# Altium PCB LV control.PcbDoc
Units mil, origin at the board's own origin, x right, y up, seen from the top; angles counter-clockwise.
Board outline 3341.46 x 4522.56 mil, 2 copper layers (Top Layer, Bottom Layer); 71 components, 60 nets, 271 pads, 23 vias.
Unrouted connection lines stored in the file: 1.
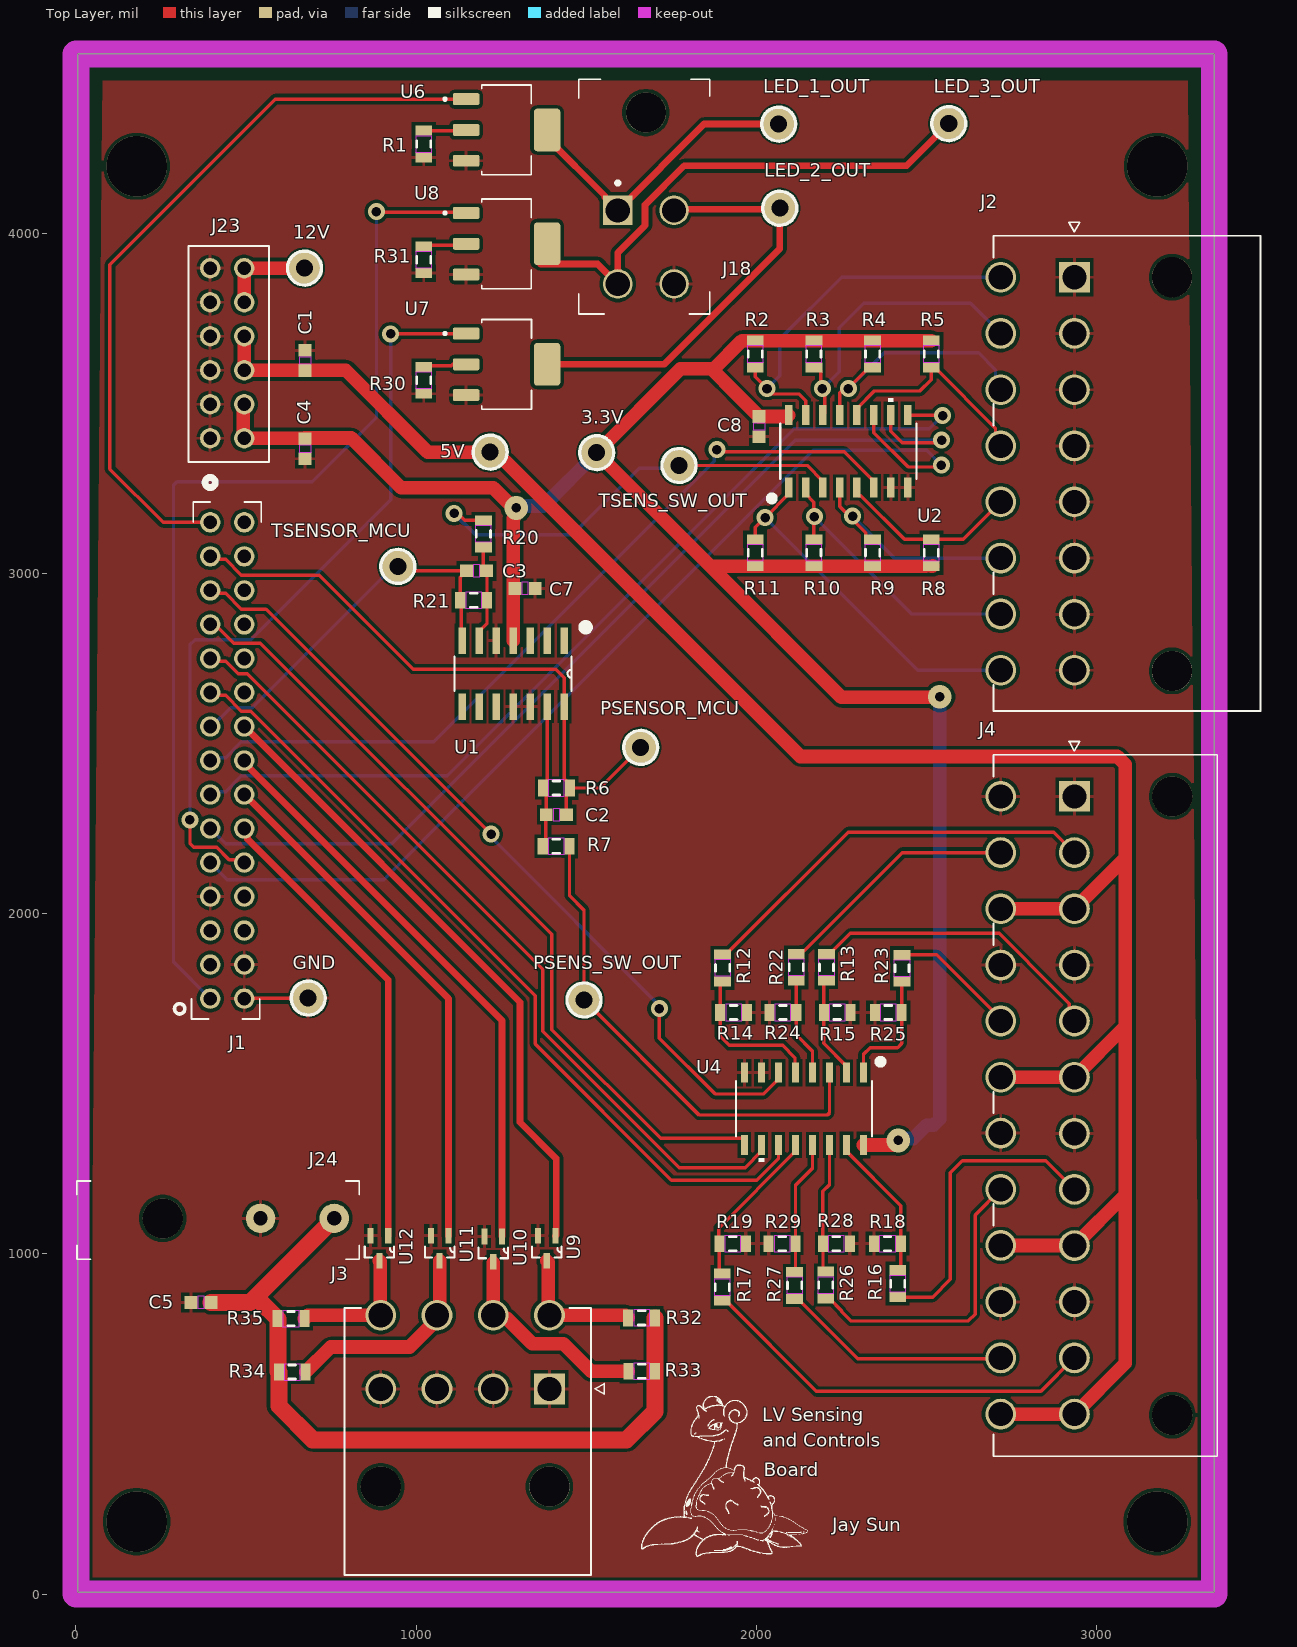
[diagram p0: Top Layer view]
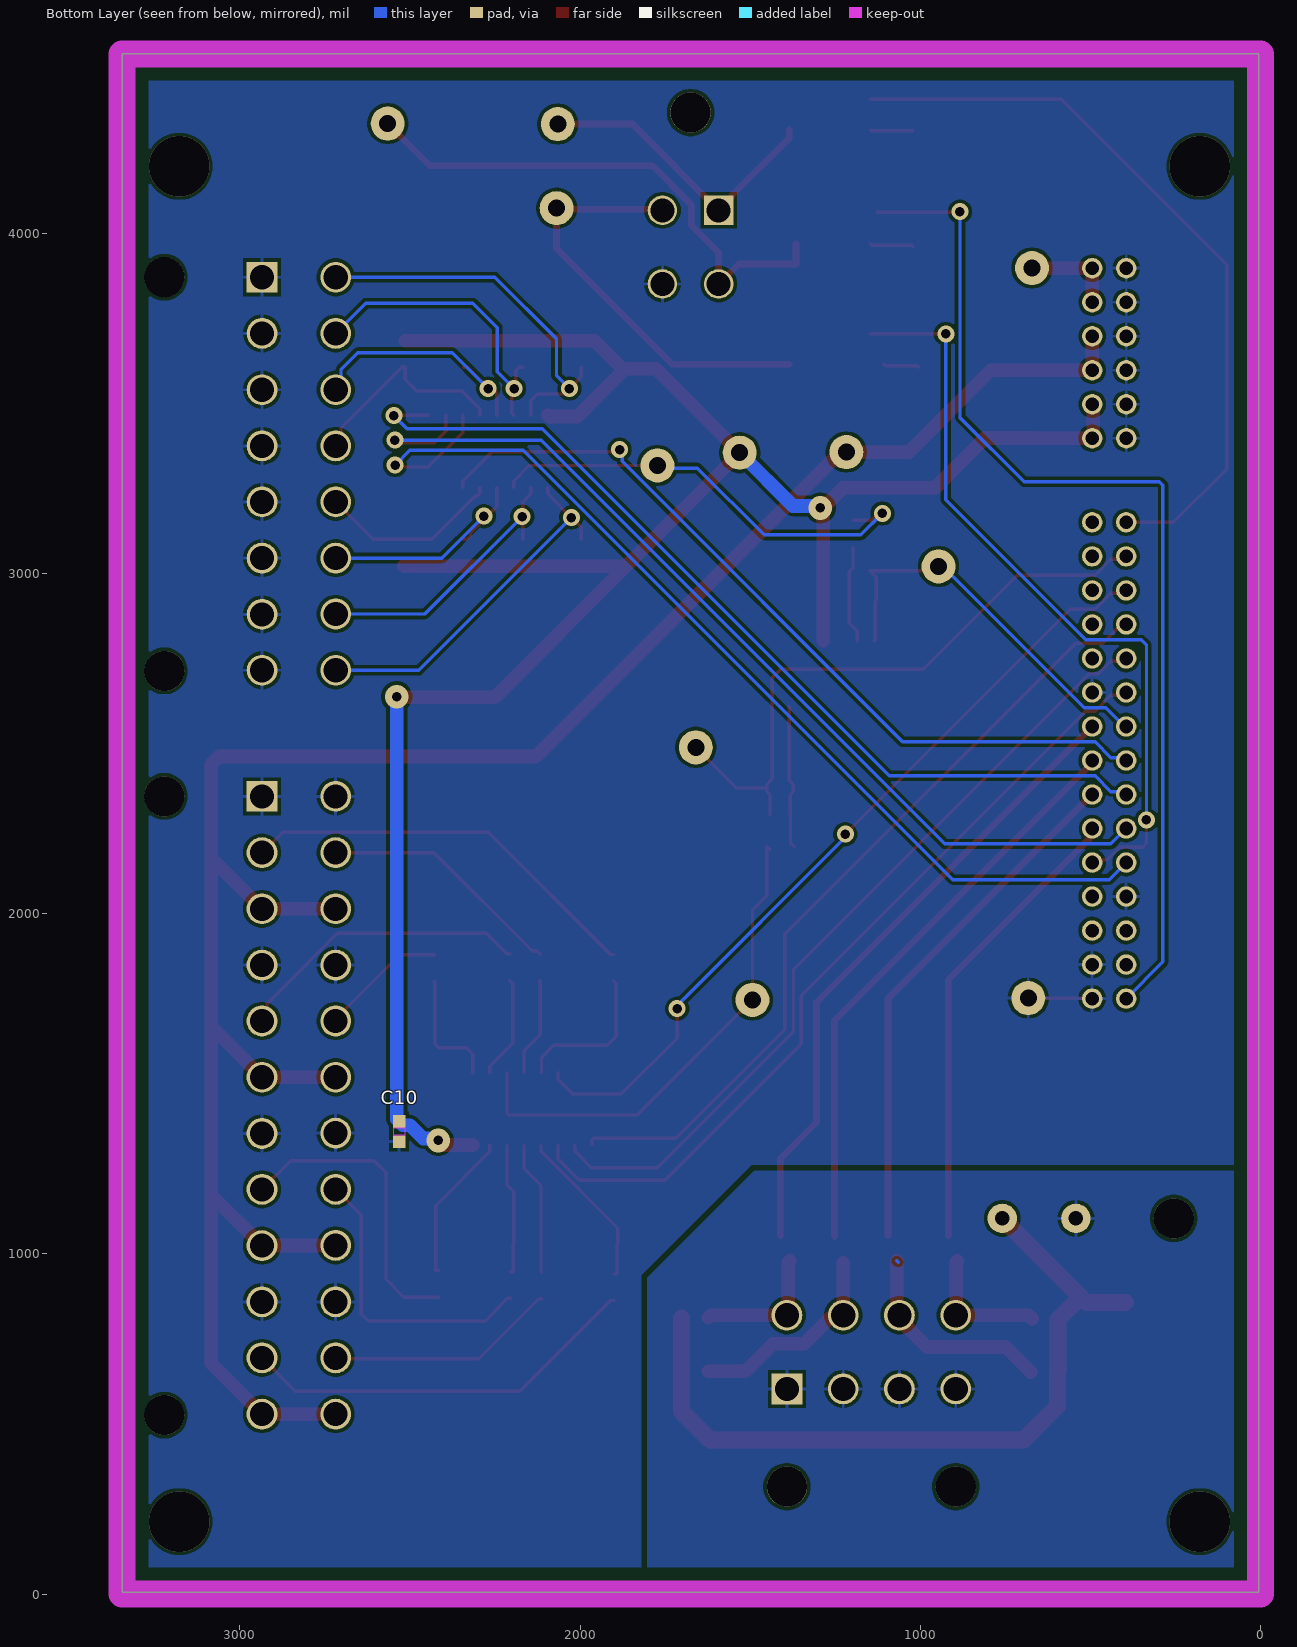
[diagram p1: Bottom Layer view, seen from below]
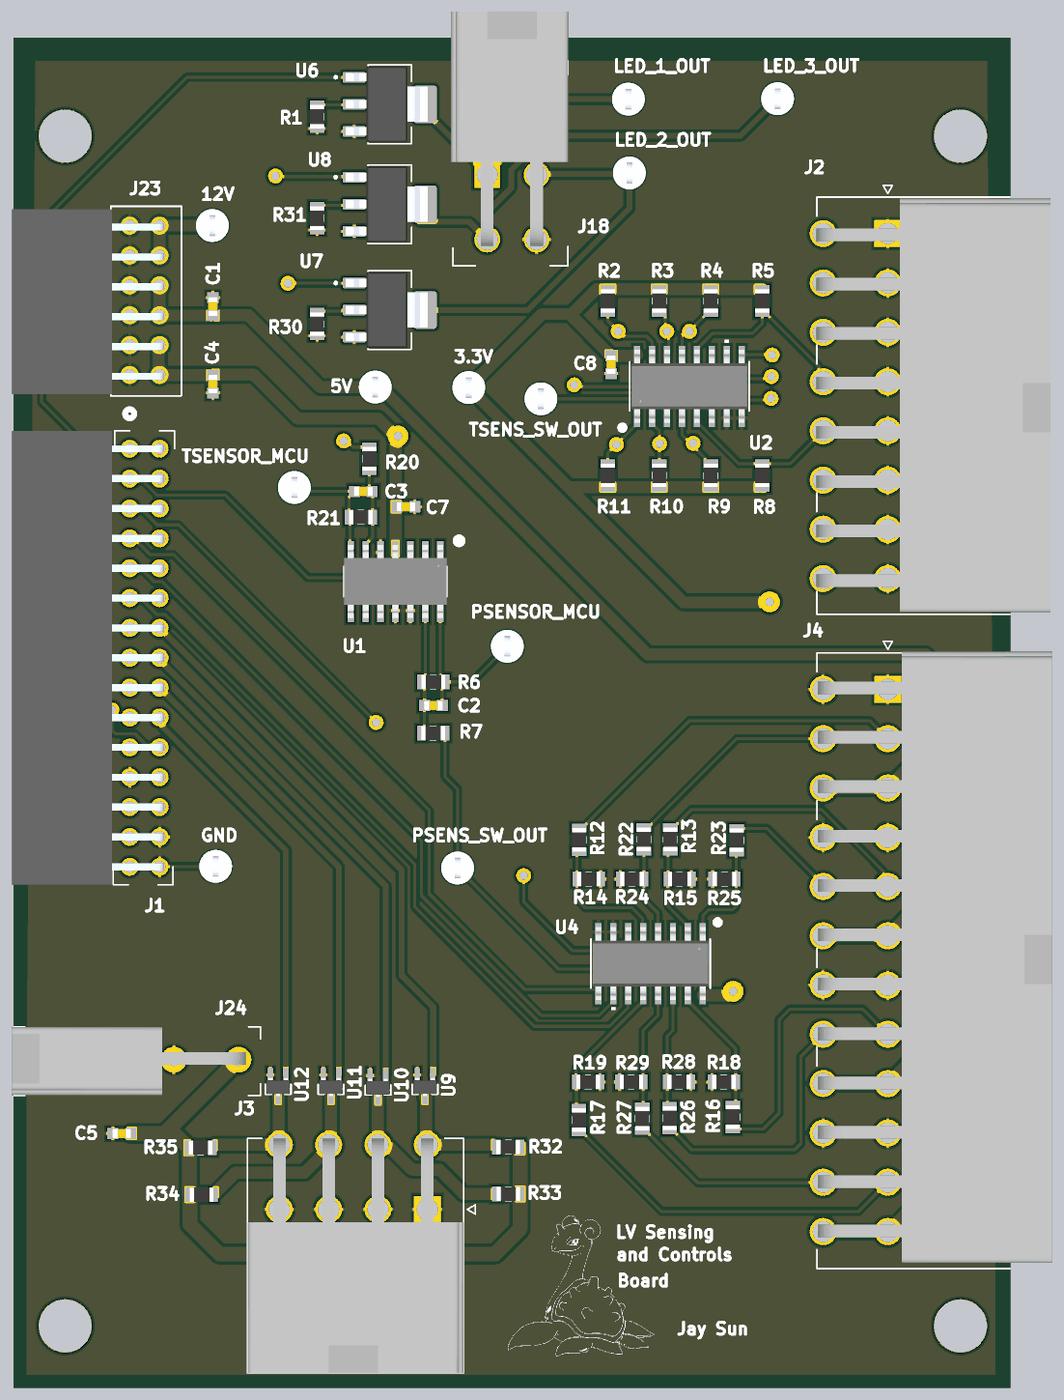
[diagram p2: 3D render of the assembled board from above, using the file's embedded part models]

## Layer stack, top to bottom
Top Solder: solder mask 0.4, Solder Resist, Dk 3.5
Top Layer: signal copper 1.4
Dielectric 1: dielectric 12.6, FR-4, Dk 4.8
Bottom Layer: signal copper 1.4
Bottom Solder: solder mask 0.4, Solder Resist, Dk 3.5

## Board outline
5,5 5,4527.56 3346.46,4527.56 3346.46,5

## Design rules (kind name [scope] priority, off if disabled: settings)
Clearance [All] p1: gap=10 ignorepadtopadclearanceinfootprint=FALSE except(0: Arc-Hole Track-Hole SMDPad-Hole THPad-Hole Via-Hole Fill-Hole Poly-Hole Region-Hole Text-Hole)
PolygonConnect [All] p1: connectstyle=Relief reliefconductorwidth=10 reliefentries=4 polygonreliefangle="90 Angle" airgapwidth=10
RoutingVias [All] p1: holewidth=28 width=50 viastyle="Through Hole" minholewidth=28 minwidth=50 maxholewidth=28 maxwidth=50
SolderMaskExpansion [All] p1: expansion=4 istentingtop=FALSE
Width [All] p1: maxlimit=55 minlimit=7.87 preferedwidth=10 minimp=50.000000 maximp=50.000000 favimp=50.000000
30 further rules are at their usual default settings.

## Classes and differential pairs
component class Thermistors: C8 J2 R2 R3 R4 R5 R8 R9 R10 R11 TSENS_SW_OUT U2
component class PressureSensors: C10 J4 PSENS_SW_OUT R12 R13 R14 R15 R16 R17 R18 R19 R22 R23 R24 R25 R26 R27 R28 R29 U4
component class MCU_Platform: 3.3V 5V 12V C1 C2 C3 C4 C5 C7 GND J1 J23 PSENSOR_MCU R6 R7 R20 R21 TSENSOR_MCU U1
component class LED_Driver: J18 LED_1_OUT LED_2_OUT LED_3_OUT R1 R30 R31 U6 U7 U8
component class Braking: J3 J24 R32 R33 R34 R35 U9 U10 U11 U12

## Components (designator, comment, footprint, x,y, rotation, side; value= is the part's Value field where it differs from the comment)
3.3V "Test Point" "Test Point - 5002" 1530.98,3355.45 r90 top
5V "Test Point" "Test Point - 5002" 1217.59,3357.11 r90 top
12V "Test Point" "Test Point - 5002" 671.85,3897.98 r90 top
C1 "Capacitor - Nonpolarized" "0603 - Capacitor" 673.59,3626.61 r270 top value=10pF
C2 "Capacitor - Nonpolarized" "0603 - Capacitor" 1412.45,2290.97 r180 top value=4pF
C3 "Capacitor - Nonpolarized" "0603 - Capacitor" 1177.73,3007.89 r0 top value=4pF
C4 "Capacitor - Nonpolarized" "0603 - Capacitor" 673.59,3367.12 r90 top value=10pF
C5 "Capacitor - Nonpolarized" "0603 - Capacitor" 367.84,857.42 r0 top value=10pF
C7 "Capacitor - Nonpolarized" "0603 - Capacitor" 1320.57,2956.24 r180 top value=1uF
C8 "Capacitor - Nonpolarized" "0603 - Capacitor" 2008.19,3432.08 r90 top value=1uF
C10 "Capacitor - Nonpolarized" "0603 - Capacitor" 2532.26,1359.58 r90 bottom value=1uF
GND "Test Point" "Test Point - 5002" 682.75,1752.14 r90 top
J1 "G431 GPIO" "G431 Header (GPIO Connector)" 10,3205.47 r270 top
J2 "MOLEX0039301162" MOLEX0039301162 2935.12,3871.1 r90 top
J3 "MOLEX0039301082" MOLEX0039301082 1392.13,603.23 r0 top
J4 "MOLEX0039301242" MOLEX0039301242 2935.26,2345.07 r90 top
J18 "MOLEX0039301042" MOLEX0039301042 1592.91,4067.8 r180 top
J23 "G431 POWER" "G431 HEADER (POWER CONNECTOR)" 494.72,3897.65 r270 top
J24 "MOLEX0039301021" MOLEX0039301021 542.73,1104.45 r270 top
LED_1_OUT "Test Point" "Test Point - 5002" 2065.9,4321.27 r270 top
LED_2_OUT "Test Point" "Test Point - 5002" 2069.19,4074.04 r270 top
LED_3_OUT "Test Point" "Test Point - 5002" 2565.81,4322.81 r270 top
PSENS_SW_OUT "Test Point" "Test Point - 5002" 1493.53,1746.5 r90 top
PSENSOR_MCU "Test Point" "Test Point - 5002" 1660.16,2488.96 r90 top
R1 "Resistor" "0805 - Resistor" 1022.51,4262.59 r270 top value=100
R2 "Resistor" "0805 - Resistor" 1996.8,3645.46 r270 top value=10k
R3 "Resistor" "0805 - Resistor" 2169.37,3645.46 r270 top value=10k
R4 "Resistor" "0805 - Resistor" 2341.94,3645.46 r270 top value=10k
R5 "Resistor" "0805 - Resistor" 2514.51,3645.46 r270 top value=10k
R6 "Resistor" "0805 - Resistor" 1412.45,2369.71 r180 top value=2.1k
R7 "Resistor" "0805 - Resistor" 1411.71,2198.42 r0 top value=2.1k
R8 "Resistor" "0805 - Resistor" 2514.51,3061.25 r90 top value=10k
R9 "Resistor" "0805 - Resistor" 2341.94,3061.25 r90 top value=10k
R10 "Resistor" "0805 - Resistor" 2169.37,3061.25 r90 top value=10k
R11 "Resistor" "0805 - Resistor" 1996.8,3061.25 r90 top value=10k
R12 "Resistor" "0805 - Resistor" 1900.97,1840.79 r270 top value=10k
R13 "Resistor" "0805 - Resistor" 2206.49,1842.48 r270 top value=10k
R14 "Resistor" "0805 - Resistor" 1933.33,1709.7 r180 top value=20k
R15 "Resistor" "0805 - Resistor" 2237.94,1709.7 r180 top value=20k
R16 "Resistor" "0805 - Resistor" 2415.61,912.55 r90 top value=10k
R17 "Resistor" "0805 - Resistor" 1900.09,902.43 r90 top value=10k
R18 "Resistor" "0805 - Resistor" 2385.68,1030.15 r0 top value=20k
R19 "Resistor" "0805 - Resistor" 1931.02,1030.15 r180 top value=20k
R20 "Resistor" "0805 - Resistor" 1197.92,3116.74 r270 top value=2.1k
R21 "Resistor" "0805 - Resistor" 1169.23,2921.32 r180 top value=2.1k
R22 "Resistor" "0805 - Resistor" 2117.51,1842.48 r270 top value=10k
R23 "Resistor" "0805 - Resistor" 2428.48,1839.76 r270 top value=10k
R24 "Resistor" "0805 - Resistor" 2078.22,1709.7 r0 top value=20k
R25 "Resistor" "0805 - Resistor" 2387.99,1709.7 r0 top value=20k
R26 "Resistor" "0805 - Resistor" 2204.14,908.5 r90 top value=10k
R27 "Resistor" "0805 - Resistor" 2112.57,907.49 r90 top value=10k
R28 "Resistor" "0805 - Resistor" 2235.63,1030.15 r180 top value=20k
R29 "Resistor" "0805 - Resistor" 2075.91,1030.15 r0 top value=20k
R30 "Resistor" "0805 - Resistor" 1022.51,3567.99 r270 top value=100
R31 "Resistor" "0805 - Resistor" 1022.51,3922.32 r270 top value=100
R32 "Resistor" "0805 - Resistor" 1662.95,811.94 r0 top value=100
R33 "Resistor" "0805 - Resistor" 1663.46,655.09 r0 top value=100
R34 "Resistor" "0805 - Resistor" 635.92,652.72 r180 top value=100
R35 "Resistor" "0805 - Resistor" 632.35,809.81 r180 top value=100
TSENS_SW_OUT "Test Point" "Test Point - 5002" 1772.76,3317.72 r90 top
TSENSOR_MCU "Test Point" "Test Point - 5002" 946.43,3020.91 r90 top
U1 "LM324DR" LM324DR 1279.62,2700.43 r270 top
U2 "MC74HC4051ADR2G" MC74HC4051ADR2G 2268.53,3359.66 r90 top
U4 "MC74HC4051ADR2G" MC74HC4051ADR2G 2142.21,1426.26 r270 top
U6 "NCR321ZX" "NCR321ZX LED driver" 1266.14,4304.02 r0 top
U7 "NCR321ZX" "NCR321ZX LED driver" 1266.14,3615.04 r0 top
U8 "NCR321ZX" "NCR321ZX LED driver" 1266.14,3969.37 r0 top
U9 "2N7002PW,115" SOT65P210X110-3N 1384.25,1016.61 r270 top
U10 "2N7002PW,115" SOT65P210X110-3N 1226.77,1014.24 r270 top
U11 "2N7002PW,115" SOT65P210X110-3N 1069.29,1016.61 r270 top
U12 "2N7002PW,115" SOT65P210X110-3N 892.13,1016.61 r270 top

## Footprints (in the part's own frame and the unit in brackets; to place one, negate y for a bottom-side part, rotate by r counter-clockwise, add the part's x,y. Pads: shape width x height; smd on the part's side, far side on the other; paste and mask are expansions set on the pad)
"0603 - Capacitor" [mm] "0603 Chip Capacitor - IPC Medium Density"
  rect 0.95x0.95 smd: 1(-0.75,0) 2(0.75,0)
  Top Layer keep-out region: -0.25,0.45 -0.25,-0.45 0.25,-0.45 0.25,0.45
  body extent -0.8,-0.4 0.8,0.4, height 0.8
"0805 - Resistor" [mm] "0805 Chip Resistor - IPC Medium Density"
  rect 0.75x1.25 smd: 1(-1,0) 2(1,0)
  Top Layer keep-out region: -0.6,0.6 -0.6,-0.6 0.6,-0.6 0.6,0.6
  silkscreen extent -0.25,-0.53 0.25,0.53, body extent -1,-0.6 1,0.6, height 0.5
"G431 Header (GPIO Connector)" [mil] "30 Position Header Connector 0.100\" (2.54mm) Through Hole, Right Angle Gold"
  round 60 hole 40.16: 1(1455,385) 2(1355,385) 3(1255,385) 4(1155,385) 5(1055,385) 6(955,385) 7(855,385) 8(755,385) 9(655,385) 10(555,385) 11(455,385) 12(355,385) 13(255,385) 14(155,385) 15(55,385) 16(1455,485) 17(1355,485) 18(1255,485) 19(1155,485) 20(1055,485) 21(955,485) 22(855,485) 23(755,485) 24(655,485) 25(555,485) 26(455,485) 27(355,485) 28(255,485) 29(155,485) 30(55,485)
  silkscreen extent -5,280 1515,535, body extent -5,-10 1515,499, height 208
"G431 HEADER (POWER CONNECTOR)" [mil] "12 Position Header Connector 0.100\" (2.54mm) Through Hole, Right Angle Gold"
  round 60 hole 40 mask+0: 1(500,-100) 2(400,-100) 3(300,-100) 4(200,-100) 5(100,-100) 6(0,-100) 7(500,0) 8(400,0) 9(300,0) 10(200,0) 11(100,0) 12(0,0)
  silkscreen extent -65,-164 645,74, body extent -55,-495 565,15, height 200
LM324DR [mil] "General Purpose Amplifier 4 Circuit 14-SOIC"
  rect 78x22 smd: 1(-102.35,155.67) 2(-102.35,105.67) 3(-102.35,55.67) 4(-102.35,5.67) 5(-102.35,-44.33) 6(-102.35,-94.33) 7(-102.35,-144.33) 8(91.65,-144.33) 9(91.65,-94.33) 10(91.65,-44.33) 11(91.65,5.67) 12(91.65,55.67) 13(91.65,105.67) 14(91.65,155.67)
  silkscreen extent -152,-166 46,229, body extent -127,-166 117,178, height 69
MC74HC4051ADR2G [mil] "1 Circuit IC Switch 8:1 100Ohm 16-SOIC"
  rect 58.78x20.97 smd paste+0 mask+0: 1(-106.62,173.03) 2(-106.62,123.03) 3(-106.62,73.03) 4(-106.62,23.03) 5(-106.62,-26.97) 6(-106.62,-76.97) 7(-106.62,-126.97) 8(-106.62,-176.97) 9(106.15,-176.97) 10(106.15,-126.97) 11(106.15,-76.97) 12(106.15,-26.97) 13(106.15,23.03) 14(106.15,73.03) 15(106.15,123.03) 16(106.15,173.03)
  silkscreen extent -144,-202 156,228, body extent -122,-197 122,193, height 69
MOLEX0039301021 [mm] "2 connector header through hole right angle molex"
  round 2.2 hole 1.07: 1(0,5.5) 2(0,0)
  round 3 hole 3: M1(0,-7.3)
  silkscreen extent -2.79,-13.72 3.05,7.37, body extent -2.79,-13.78 3.01,6.16, height 11.4
MOLEX0039301042 [mm] "CONN HEADER R/A 4POS 4.2MM"
  rect 2.2x2.2 hole 1.8: 1(0,0)
  round 2.2 hole 1.8: 2(-4.2,0) 3(0,5.5) 4(-4.2,5.5)
  round 3 hole 3: M1(-2.1,-7.3)
  silkscreen extent -6.86,-9.78 2.92,7.75, body extent -6.9,-13.9 3.1,6.04, height 11.01
MOLEX0039301082 [mm] "CONN HEADER R/A 8POS 4.2MM"
  rect 2.3x2.3 hole 1.8 mask+0.076: 1(0,0)
  round 2.3 hole 1.8 mask+0.076: 2(-4.2,0) 3(-8.4,0) 4(-12.6,0) 5(0,5.5) 6(-4.2,5.5) 7(-8.4,5.5) 8(-12.6,5.5)
  round 3 hole 3 unplated mask+0.076: ""(-12.6,-7.3) ""(0,-7.3)
  silkscreen extent -15.3,-13.9 4.1,6.04, body extent -15.3,-13.9 3.1,6.04, height 11.01
MOLEX0039301162 [mm] "CONN HEADER R/A 16POS 4.2MM"
  rect 2.3x2.3 hole 1.8 mask+0.076: 1(0,0)
  round 2.3 hole 1.8 mask+0.076: 2(-4.2,0) 3(-8.4,0) 4(-12.6,0) 5(-16.773,0) 6(-20.973,0) 7(-25.173,0) 8(-29.346,0) 9(0,5.5) 10(-4.2,5.5) 11(-8.4,5.5) 12(-12.6,5.5) 13(-16.773,5.5) 14(-20.973,5.5) 15(-25.146,5.5) 16(-29.346,5.5)
  round 3 hole 3 unplated mask+0.076: ""(-29.4,-7.3) ""(0,-7.3)
  silkscreen extent -32.38,-13.9 4.1,6.04, body extent -32.21,-13.84 3,6.09, height 11.4
MOLEX0039301242 [mm] "CONN HEADER R/A 24POS 4.2MM"
  rect 2.3x2.3 hole 1.8 mask+0.076: 1(0,0)
  round 2.3 hole 1.8 mask+0.076: 2(-4.2,0) 3(-8.4,0) 4(-12.6,0) 5(-16.773,0) 6(-20.973,0) 7(-25.173,0) 8(-29.346,0) 9(-33.546,0) 10(-37.746,0) 11(-41.928,0) 12(-46.128,0) 13(0,5.5) 14(-4.2,5.5) 15(-8.4,5.5) 16(-12.6,5.5) 17(-16.773,5.5) 18(-20.973,5.5) 19(-25.146,5.5) 20(-29.346,5.5) 21(-33.528,5.5) 22(-37.746,5.5) 23(-41.928,5.5) 24(-46.128,5.5)
  round 3 hole 3 unplated mask+0.076: ""(-46.2,-7.3) ""(0,-7.3)
  silkscreen extent -49.28,-10.67 4.1,6.04, body extent -48.79,-13.97 3.21,5.97, height 11.4
"NCR321ZX LED driver" [mm] "IC LED DRVR LIN PWM 250MA SOT223"
  rrect25% 1.97x0.89 smd: 1(-3.025,2.3) 2(-3.025,0) 3(-3.025,-2.3)
  rrect25% 1.97x3.19 smd: 4(3.025,0)
  silkscreen extent -4.7,-3.35 1.85,3.35, body extent -3.75,-3.25 3.25,3.25, height 1.8
SOT65P210X110-3N [mil] "MOSFET N-CH 60V 310MA SOT323"
  rect 46x18 smd: 1(-37,26) 2(-37,-26) 3(37,0)
  silkscreen extent -5,-43 27,43, body extent -37,-39 45,39, height 14
"Test Point - 5002" [mil] "5002 - PCB TEST POINT WHITE .040"
  round 100 hole 50: 1(0,0)
  silkscreen extent -50,-50 50,50, body extent -50,-50 50,50, height 180

## Part data
C1 C2 C3 C4 C5 C7 C8 C10: "Nonpolarized Capacitor"
J1: "PPPC152LJBN-RC (30 Position Header Connector 0.100\" (2.54mm) Through Hole, Right Angle Gold)", Manufacturer Name="Sullins Connector Solutions", Manufacturer Part Number (CONN)=PPPC152LJBN-RC, Supplier Part Number=S5568-ND, Supplier Name=Digikey
J2: "Connector Header Through Hole, Right Angle 16 position 0.165\" (4.20mm)", Manufacturer=Molex, Manufacturer Part Number=0039301082, Supplier Part Number=WM21366-ND, ComponentLink1Description=Datasheet, ComponentLink1URL=https://www.molex.com/pdm_docs/sd/039301082_sd.pdf, Supplier=DigiKey
J3: "Connector Header Through Hole, Right Angle 8 position 0.165\" (4.20mm)", Manufacturer=Molex, Manufacturer Part Number=0039301082, Supplier Part Number=WM21366-ND, ComponentLink1Description=Datasheet, ComponentLink1URL=https://www.molex.com/pdm_docs/sd/039301082_sd.pdf, Supplier=DigiKey
J4: "Connector Header Through Hole, Right Angle 24 position 0.165\" (4.20mm)", Manufacturer=Molex, Manufacturer Part Number=0039301082, Supplier Part Number=WM21366-ND, ComponentLink1Description=Datasheet, ComponentLink1URL=https://www.molex.com/pdm_docs/sd/039301082_sd.pdf, Supplier=DigiKey
J18: "Connector Header Through Hole, Right Angle 4 position 0.165\" (4.20mm)", Manufacturer=Molex, Manufacturer Part Number=0039301042, Supplier Part Number=WM21364-ND, ComponentLink1Description=Datasheet, ComponentLink1URL=https://www.molex.com/pdm_docs/sd/039301042_sd.pdf, Supplier=Digikey
J23: "PPPC062LJBN-RC (12 Position Header Connector 0.100\" (2.54mm) Through Hole, Right Angle Gold)", Manufacturer Name="Sullins Connector Solutions", Manufacturer Part Number=PPPC062LJBN-RC, Supplier Part Number=S5559-ND, Supplier Name=Digikey
J24: "Connector Header Through Hole, Right Angle 2 pin 0.165\" (4.20mm)"
U1: "General Purpose Amplifier 4 Circuit 14-SOIC", Manufacturer Name=TI, Supplier Part Number=296-14597-2-ND, Manufacturer Part Number=LM324DR, Supplier=Digikey
U2 U4: "1 Circuit IC Switch 8:1 100Ohm 16-SOIC", Manufacturer Name=onsemi, Supplier Part Number=MC74HC4051ADR2GOSTR-ND, Manufacturer Part Number=MC74HC4051ADR2G, Supplier Name=Digikey
U6 U7 U8: "IC LED DRVR LIN PWM 250MA SOT223", Manufacturer Name="Nexperia USA Inc.", Supplier Part Number=1727-8461-2-ND, ComponentLink1Description=Datasheet, ComponentLink1URL=https://assets.nexperia.com/documents/data-sheet/NCR320Z_NCR321Z.pdf, Manufacturer Part Number=NCR321ZX, Supplier 1=Digikey
U9 U10 U11 U12: "N-Channel 60V 310mA (Ta) 260mW (Ta) Surface Mount SOT-323", Package="SOT-323 Nexperia", ComponentLink1Description="Manufacturer name", ComponentLink1URL="*Nexperia USA Inc.", ComponentLink2Description="Manufacturer part number", ComponentLink2URL=PMF370XN,115, ComponentLink3Description="Supplier name", ComponentLink3URL=Digikey, ComponentLink4Description="Supplier part #", ComponentLink4URL=1727-5422-2-ND, Digi-Key_Part_Number=1727-4793-1-ND, MF="Nexperia USA", MP=2N7002PW,115, SnapEDA_Link=https://www.snapeda.com/parts/2N7002PW,115/Nexperia%20USA%20Inc./view-part/2152859/?ref=snap

## Via types
v1: diameter 50, hole 28, Top Layer to Bottom Layer, 16 vias
v2: diameter 177.17, hole 177.17, Top Layer to Bottom Layer, 4 vias
v3: diameter 70, hole 28, Top Layer to Bottom Layer, 3 vias

## Nets (pads, with @x,y where several pads share a name; then routed paths per layer and width w, separated by ;. In a path a pad name is that pad's centre, name@x,y a point inside that pad or via, vN(x,y) a via of type N, cw(c..) or ccw(c..) an arc to the next point about the centre after c; other vN are vias at no path point)
3.3V: 3.3V.1 C4.2 C7.2 C8.2 C10.2 J23.7 J23.8 R2.1 R3.1 R4.1 R5.1 R8.1 R9.1 R10.1 R11.1 U1.4 U2.16 U4.16 | length 6532.5
  Top Layer w40: J23.8@492.91,3497.65 492.13,3496.87 492.13,3398.44 492.91,3397.65 J23.7 671.35,3397.65 672.23,3398.53 809.9,3398.53 956.71,3251.72 1227.36,3251.72 1286.11,3192.97 v3(1294.23,3192.97) 1288.49,3187.23 1288.49,3166.02 1285.28,3162.81 1285.28,2956.24 U1.4 ; U2.16 2091.44,3461.75 2008.33,3461.75 C8.2 1934.92,3534.87 1934.92,3535.18 1875.36,3594.75 1875.36,3601.87 ; U4.16 2403.86,1320.11 v3(2417.22,1333.47) ; R8.1@2498.76,3021.88 R9.1 R10.1 R11.1 1864.55,3021.88 ; R8.1 2517.72,3021.88 R8.1@2518.28,3022.45 ; R5.1 R4.1 R3.1 R2.1 1958.32,3684.83 1875.36,3601.87 ; v3(2539.28,2637.94) 2537.18,2635.84 2250.6,2635.84 1864.55,3021.88 ; 1864.55,3021.88 3.3V.1 1777.4,3601.87 1875.36,3601.87
  Bottom Layer w40: v3(1294.23,3192.97) 1299.97,3198.71 1374.24,3198.71 3.3V.1 ; v3(2417.22,1333.47) 2422.96,1339.21 2461.58,1339.21 2501.13,1378.75 2521.9,1378.75 2539.28,1396.13 v3(2539.28,2637.94)
5V: 5V.1 C1.2 J4.3 J4.6 J4.9 J4.12 J4.15 J4.18 J4.21 J4.24 J23.9 J23.10 | length 6648.3
  Top Layer w40: J23.10 J23.9 495.29,3597.09 C1.2 709.98,3597.09 710.51,3597.61 793.21,3597.61 1033.72,3357.11 5V.1 ; 5V.1@1220.33,3371.93 1220.33,3370.61 1262.83,3328.11 1264.15,3328.11 2130.11,2462.15 3061.54,2462.15 3084.97,2438.72 3084.97,2164.08 ; J4.24 J4.12 3084.97,678.72 3084.97,1174.08 ; J4.21 2719.08,1024.72 2934.9,1024.72 J4.9 3084.97,1174.08 ; J4.18 J4.6 3084.97,1669.08 ; J4.15 J4.3 3084.97,2164.08 ; 3084.97,1174.08 3084.97,1669.08 ; 3084.97,1669.08 3084.97,2164.08
12V: 12V.1 J23.11 J23.12 | length 277.3
  Top Layer w40: J23.11 J23.12 494.89,3897.82 671.68,3897.82 12V.1
22.1V: C5.2 J24.1 R32.2 R33.2 R34.2 R35.2 | length 2279.8
  Top Layer w40: 512.24,857.42 544.74,857.42 ; R35.2@592.35,809.81 R35.2 R35.2@594.77,808.03 ; R34.2@594.77,654.51 R34.2 ; R32.2 R32.2@1702.57,811.68 ; R33.2@1702.57,655.34 R33.2
  Top Layer w50: C5.2 512.24,857.42 528.49,873.67 J24.1 ; 544.74,857.42 R35.2@592.35,809.81 ; R34.2@594.77,654.51 R35.2@594.77,808.03 ; R34.2 596.55,553.17 696.12,453.6 1619,453.6 1702.83,537.43 R33.2 ; R33.2@1702.57,655.34 R32.2@1702.57,811.68
EN_P: J1.13 U4.6 | length 2382.3
  Top Layer w10: J1.13 403.64,2941.83 440,2941.83 486.36,2895.47 558.94,2895.47 v1(1220.63,2233.79) ; v1(1715.06,1721.03) 1715.06,1633.8 1878.7,1470.16 2021.42,1470.16 2065.24,1513.98 U4.6
  Bottom Layer w10: v1(1220.63,2233.79) 1220.63,2224.62 1715.06,1730.19 v1(1715.06,1721.03)
EN_T: J1.8 U2.6 | length 2402.1
  Top Layer w10: v1(1884.27,3364.41) 1890.45,3358.22 2259.21,3358.22 2345.49,3271.94 U2.6
  Bottom Layer w10: J1.8 403.64,2459.11 440,2459.11 486.36,2505.47 1052.44,2505.47 1876.61,3329.65 1876.61,3356.75 v1(1884.27,3364.41)
GND: C1.1 C4.1 C5.1 C7.1 C8.1 C10.1 GND.1 J1.4 J1.16 J1.17 J1.25 J2.1 J2.2 J2.3 J2.4 J2.5 J2.6 J2.7 J2.8 J3.1 J3.2 J3.3 J3.4 J4.1 J4.4 J4.7 J4.10 J4.13 J4.16 J4.19 J4.22 J18.4 J23.1 J23.2 J23.3 J23.4 J23.5 J23.6 J24.2 R1.2 R14.1 R15.1 R18.1 R19.1 R24.1 R25.1 R28.1 R29.1 R30.2 R31.2 U1.5 U1.11 U1.12 U2.7 U2.8 U4.7 U4.8 U6.3 U7.3 U8.3 U9.2 U10.2 U11.2 U12.2 | length 188.4
  Top Layer w10: J1.16 495.84,1751.31 681.91,1751.31 GND.1
LED_in_1: J18.1 LED_1_OUT.1 U6.4 | length 900.2
  Top Layer w20: U6.4 1385.23,4280 1554.6,4110.63 1554.6,4106.1 J18.1 1846.39,4321.27 LED_1_OUT.1
LED_in_2: J18.2 LED_2_OUT.1 U7.4 | length 1257.2
  Top Layer w20: U7.4 1729.03,3615.04 2069.19,3955.21 LED_2_OUT.1 2066.07,4070.92 1761.39,4070.92 J18.2
LED_in_3: J18.3 LED_3_OUT.1 U8.4 | length 1568.4
  Top Layer w20: U8.4@1365.55,3969.37 1365.55,3910.31 1533.86,3910.31 J18.3 1592.91,3943.19 1673.32,4023.6 1673.32,4084.07 1788.03,4198.77 2441.77,4198.77 LED_3_OUT.1
NetC2_2: C2.2 R6.2 R7.1 U1.13 | length 423.9
  Top Layer w10: R7.1 1381.71,2207.8 1381.71,2289.76 C2.2 1382.92,2350.02 1373.08,2359.86 R6.2 1373.08,2379.55 1385.28,2391.75 U1.13
NetC3_2: C3.2 R20.2 R21.1 U1.6 | length 288.7
  Top Layer w10: U1.6 1185.28,2830.78 1208.6,2854.09 R21.1 1208.6,3006.55 C3.2 1197.92,3017.23 R20.2
NetR1_1: R1.1 U6.2 | length 125.4
  Top Layer w10: R1.1 1144.99,4301.96 U6.2
NetR30_1: R30.1 U7.2 | length 111.1
  Top Layer w10: R30.1@1008.94,3611.2 1005.12,3607.38 1008.94,3607.36 1012.78,3611.2 1103.84,3611.2 1107.68,3615.04
NetR31_1: R31.1 U8.2 | length 127.7
  Top Layer w10: R31.1 1026.35,3965.53 1143.21,3965.53 U8.2
P_A: J1.10 U4.11 | length 2414.3
  Top Layer w10: J1.10 403.64,2641.83 440,2641.83 486.36,2595.47 513.64,2595.47 1349.92,1759.19 1349.92,1617.08 1750.67,1216.32 2002.08,1216.32 2065.24,1279.49 U4.11
P_B: J1.11 U4.10 | length 2385.9
  Top Layer w10: J1.11 403.64,2741.83 440,2741.83 476.82,2705.01 504.1,2705.01 1372.8,1836.31 1372.8,1654 1773.45,1253.35 1967.39,1253.35 2015.24,1301.2 U4.10
P_C: J1.12 U4.9 | length 2376.2
  Top Layer w10: J1.12 408.46,2850.47 463.46,2795.47 542.47,2795.47 1398.83,1939.11 1398.83,1659.48 1718.58,1339.74 1959.76,1339.74 1965.24,1334.25 U4.9
P_OUT: PSENS_SW_OUT.1 R7.2 U4.3 | length 1464.4
  Top Layer w10: R7.2@1442.52,2189.86 R7.2 1451.08,2053.07 1493.53,2010.62 PSENS_SW_OUT.1 1831.62,1408.41 2209.38,1408.41 2215.24,1414.27 U4.3
PCONN0: J4.2 R12.1 | length 1208.3
  Top Layer w10: R12.1 1910.81,1880.16 2270.64,2239.99 2874.98,2239.99 J4.2
PCONN1: J4.5 R13.1 | length 881.5
  Top Layer w10: R13.1 2216.33,1881.85 2276.69,1942.2 2713.84,1942.2 2884.88,1771.17 2884.88,1771.01 2920.59,1735.3 2920.59,1699.38 J4.5
PCONN2: J4.8 R16.1 | length 904.2
  Top Layer w10: R16.1 2518.75,873.18 2570.67,925.1 2570.67,1238.57 2606.11,1274.01 2850.97,1274.01 J4.8
PCONN3: J4.11 R17.1 | length 1186.4
  Top Layer w10: R17.1 1909.93,863.06 2176.89,596.11 2837,596.11 J4.11
PCONN4: J4.14 R22.1 | length 724.6
  Top Layer w10: R22.1 2127.28,1891.61 2141.53,1891.61 2429.63,2179.72 J4.14
PCONN5: J4.17 R23.1 | length 374.4
  Top Layer w10: R23.1 2530.49,1879.13 2718.72,1690.9 J4.17
PCONN6: J4.20 R26.1 | length 874.2
  Top Layer w10: R26.1 2213.98,869.13 2250.86,832.25 2250.86,830.01 2277.98,802.89 2623.22,802.89 2643.39,823.06 2643.39,1114.38 J4.20
PCONN7: J4.23 R27.1 | length 679.8
  Top Layer w10: R27.1 2122.41,868.12 2298.24,692.29 2716.65,692.29 J4.23
PINPUT0: R12.2 R14.2 U4.5 | length 454.9
  Top Layer w10: R12.2 1893.96,1794.42 1893.96,1640.3 1920.89,1613.36 2077.68,1613.36 2113.77,1577.28 2113.77,1534.37 U4.5
PINPUT1: R13.2 R15.2 U4.2 | length 301.3
  Top Layer w10: R13.2 2198.57,1795.19 R15.2 2198.33,1709.46 2198.33,1618.71 2265.24,1551.8 U4.2
PINPUT2: R16.2 R18.2 U4.15 | length 443.8
  Top Layer w10: U4.15 2265.24,1301.2 2425.05,1141.39 R18.2 2425.05,951.92 R16.2
PINPUT3: R17.2 R19.2 U4.12 | length 480.9
  Top Layer w10: R17.2 1891.65,941.8 R19.2 1889.84,1031.96 1889.84,1075.8 2115.24,1301.2 U4.12
PINPUT4: R22.2 R24.2 U4.4 | length 290
  Top Layer w10: R22.2 2117.59,1803.03 2117.59,1643.61 2165.24,1595.96 U4.4
PINPUT5: R23.2 R25.2 U4.1 | length 361.4
  Top Layer w10: U4.1 2315.24,1586.65 2335.01,1606.41 2415.25,1606.41 2427.37,1618.53 2427.37,1799.27 R23.2
PINPUT6: R26.2 R28.2 U4.14 | length 388.5
  Top Layer w10: R26.2 2196.26,947.87 2196.26,1030.15 2195.69,1030.73 2195.69,1183.83 2215.24,1203.39 U4.14
PINPUT7: R27.2 R29.2 U4.13 | length 396.7
  Top Layer w10: R27.2 2115.28,946.86 2115.28,1030.15 2115.28,1202.27 2165.24,1252.23 U4.13
PSENSOR_ADC: C2.1 J1.14 PSENSOR_MCU.1 R6.1 U1.14 | length 1859.7
  Top Layer w10: J1.14 403.64,3041.83 440,3041.83 486.36,2995.47 715.04,2995.47 991.72,2718.8 1410.64,2718.8 1435.28,2694.16 U1.14 1435.28,2396.09 1451.82,2379.55 R6.1 ; C2.1 1441.98,2350.02 1451.82,2359.86 R6.1 ; PSENSOR_MCU.1 1540.91,2369.71 R6.1
PWM_LED_1: J1.15 U6.1 | length 2209.8
  Top Layer w10: J1.15 256.54,3150.47 99.75,3307.26 99.75,3908.07 586.25,4394.57 U6.1
PWM_LED_2: J1.20 U7.1 | length 2242.7
  Top Layer w10: v1(335.31,2276.2) 335.31,2207.03 346.87,2195.47 413.64,2195.47 450,2159.11 486.36,2159.11 J1.20 ; v1(925.16,3704.39) 925.76,3704.99 1146.45,3704.99 U7.1
  Bottom Layer w10: v1(335.31,2276.2) 335.31,2790.19 350.59,2805.47 513.64,2805.47 925.16,3217 v1(925.16,3704.39)
PWM_LED_3: J1.1 U8.1 | length 3083.7
  Top Layer w10: v1(883.53,4063.91) 885.52,4061.92 1125.37,4061.92 U8.1@1127.36,4059.92
  Bottom Layer w10: J1.1 286.9,1858.57 286.9,3259.21 297.18,3269.5 694.73,3269.5 883.53,3458.3 v1(883.53,4063.91)
SOL_1: J3.8 R35.1 U12.3 | length 390.1
  Top Layer w40: R35.1 671.72,810 681.48,819.76 J3.8 894.09,821.73 894.09,977.64 U12.3
SOL_2: J3.7 R34.1 U11.3 | length 631.4
  Top Layer w40: R34.1 748.91,726.34 980.62,726.34 1061.42,807.13 J3.7 1069.29,827.64 U11.3
  Bottom Layer w10: 1065.35,975.68 1069.29,979.61
SOL_3: J3.6 R33.1 U10.3 | length 619.7
  Top Layer w40: J3.6@1226.47,820.07 U10.3@1226.47,974.24 ; J3.6 1236.44,810.09 1267.3,810.09 1340.96,736.43 1432.77,736.43 1514.12,655.09 R33.1
SOL_4: J3.5 R32.1 U9.3 | length 397.8
  Top Layer w40: U9.3 1388.19,975.68 1388.19,823.7 J3.5 1615.75,819.76 R32.1
SOL_MCU_1: J1.21 U12.1 | length 1372.1
  Top Layer w20: J1.21 504.57,2240.91 504.57,2219.13 918.13,1805.57 U12.1
SOL_MCU_2: J1.22 U11.1 | length 1545.5
  Top Layer w20: J1.22 1095.29,1750.18 U11.1
SOL_MCU_3: J1.23 U10.1 | length 1713.1
  Top Layer w20: J1.23 495,2443.71 1252.77,1685.94 U10.1
SOL_MCU_4: J1.24 U9.1 | length 1877.2
  Top Layer w20: J1.24 1305.7,1739.78 1305.7,1387 1411.78,1280.92 1411.78,1055.14 U9.1
T_A: J1.5 U2.11 | length 3005.7
  Top Layer w10: U2.11 2345.49,3413.78 2445.97,3313.31 2538.62,3313.31 v1(2544.26,3318.95)
  Bottom Layer w10: J1.5 445.25,2100.22 904.89,2100.22 2167.11,3362.43 2500.78,3362.43 v1(2544.26,3318.95)
T_B: J1.6 U2.10 | length 2874.6
  Top Layer w10: U2.10 2395.49,3418.17 2429.05,3384.61 2537.41,3384.61 v1(2545.07,3392.26)
  Bottom Layer w10: J1.6 440,2205.47 927.94,2205.47 2114.73,3392.26 v1(2545.07,3392.26)
T_C: J1.7 U2.9 | length 2717.3
  Top Layer w10: U2.9 2546.45,3465.81 v1(2547.89,3464.37)
  Bottom Layer w10: J1.7 403.64,2359.11 440,2359.11 486.36,2405.47 1091.32,2405.47 2111.36,3425.52 2509.03,3425.52 v1(2547.89,3464.37)
T_OUT: R20.1 TSENS_SW_OUT.1 U2.3 | length 1327.5
  Top Layer w10: v1(1111.52,3176.59) 1122.35,3176.59 1142.83,3156.1 R20.1 ; TSENS_SW_OUT.1 2149.71,3317.72 2195.49,3271.94 U2.3
  Bottom Layer w10: v1(1111.52,3176.59) 1174.63,3113.48 1459.49,3113.48 1655.96,3309.95 1764.99,3309.95 TSENS_SW_OUT.1
TINPUT0: J2.9 R2.2 U2.15 | length 1133.3
  Top Layer w10: R2.2 1996.8,3578.85 2047.96,3527.69 2125.85,3527.69 2145.49,3508.04 U2.15
  Bottom Layer w10: v1(2031.52,3543.77) 2069.48,3581.73 2069.48,3689.49 2251.1,3871.11 J2.9
TINPUT1: J2.10 R3.2 U2.14 | length 902.2
  Top Layer w10: R3.2 2179.21,3606.09 2188.98,3596.33 2188.98,3564.25 2200.88,3552.34 2200.88,3471.2 U2.14
  Bottom Layer w10: v1(2194.45,3543.77) 2243.76,3593.08 2243.76,3722.91 2315.38,3794.53 2629.81,3794.53 J2.10
TINPUT2: J2.11 R4.2 U2.13 | length 755.7
  Top Layer w10: U2.13 2245.49,3531.57 2252.69,3538.76 2264.77,3538.76 2322.34,3596.33 2332.1,3606.09 R4.2
  Bottom Layer w10: v1(2270.56,3543.77) 2376.17,3649.38 2653.43,3649.38 2703.18,3599.64 2703.18,3555.81 J2.11
TINPUT3: J2.12 R5.2 U2.12 | length 630.6
  Top Layer w10: U2.12 2295.49,3484.72 2347.4,3536.62 2481.01,3536.62 2514.51,3570.12 R5.2 2524.36,3606.09 2703.18,3427.27 2703.18,3390.45 J2.12
TINPUT4: J2.13 R8.2 U2.5 | length 542.9
  Top Layer w10: U2.5 2295.49,3234.13 2300.98,3228.64 2307.7,3228.64 2435.73,3100.62 R8.2 2608.46,3100.62 J2.13
TINPUT5: J2.14 R9.2 U2.4 | length 684.8
  Top Layer w10: U2.4 2245.49,3197.07 2322.34,3120.23 2322.34,3110.38 2332.1,3100.62 R9.2
  Bottom Layer w10: v1(2282.97,3168.71) 2406.28,3045.4 J2.14
TINPUT6: J2.15 R10.2 U2.2 | length 829
  Top Layer w10: U2.2 2145.49,3234.13 2169.37,3210.25 R10.2
  Bottom Layer w10: v1(2170.54,3167.51) 2456.94,2881.11 J2.15
TINPUT7: J2.16 R11.2 U2.1 | length 1072
  Top Layer w10: R11.2 1996.8,3135.56 v1(2025.89,3164.65) ; v1@2025.95,3164.58 2095.49,3234.13 U2.1
  Bottom Layer w10: v1(2025.89,3164.65) 2474.79,2715.75 J2.16
TSENSOR_ADC: C3.1 J1.9 R21.2 TSENSOR_MCU.1 U1.7 | length 1206.9
  Top Layer w10: TSENSOR_MCU.1 959.45,3007.89 C3.1 1129.86,2989.55 R21.2 1132.57,2918.61 1132.57,2805.49 U1.7
  Bottom Layer w10: J1.9 400,2550.47 455,2605.47 518.64,2605.47 937.17,3024 943.34,3024 TSENSOR_MCU.1 ; TSENSOR_MCU.1@946.43,3021.13 TSENSOR_MCU.1@946.43,3057.09
pads on no net: J1.2 J1.3 J1.18 J1.19 J1.26 J1.27 J1.28 J1.29 J1.30 J2. J3. J4. J18.M1 J24.M1 U1.1 U1.2 U1.3 U1.8 U1.9 U1.10
copper on no net:
  other v2: 178.66,213.03 3178.66,213.03 178.66,4197.28 3178.66,4197.28

## Polygon pours and split planes (outlines as drawn)
GND on Top Layer "GND_L01_P028" (solid, pour order 28): 39.71,39.18 78.74,4448.82 3267.72,4448.82 3305.51,41.24 3306.41,40.33
GND on Bottom Layer "GND_L02_P030" (solid, pour order 30): 78.74,78.74 1802.64,78.74 1802.64,930.5 1488.91,1244.24 78.74,1244.24
GND on Bottom Layer "GND_L02_P029" (solid, pour order 29): 78.74,1262.24 1492.64,1262.24 cw(c1492.64,1253.24) 1499,1259.61 1818.01,940.6 cw(c1811.64,934.24) 1820.64,934.24 1820.64,78.74 1820.49,78.74 3267.72,78.74 3267.72,4448.82 78.74,4448.82

## Keep-outs
Keep-Out Layer:
  lines w10: 0,4526.38 2.1,4524.28 ; 3344.39,4524.28 3346.49,4522.18 ; 3345.7,0 3346.49,0.8
  lines w78.74: 0,0 0,4527.56 3346.46,4527.56 3346.46,0 0,0

## Silkscreen, mask and mechanical layers (free items; w line width, h text height)
Top Overlay:
  drawing of 110 lines, arcs and shapes, not listed
  text "LV Sensing" at 2017.78,508.31 h40
  text "and Controls" at 2019.57,433.37 h40
  text "Board" at 2022.24,345.87 h40
  text "Jay Sun" at 2223.13,185.1 h40